# Altium PCB Boost.PcbDoc
Units mil, origin at the board's own origin, x right, y up, seen from the top; angles counter-clockwise.
Board outline 6000 x 4000 mil, 2 copper layers (Top Layer, Bottom Layer); 33 components, 23 nets, 125 pads, 38 vias.
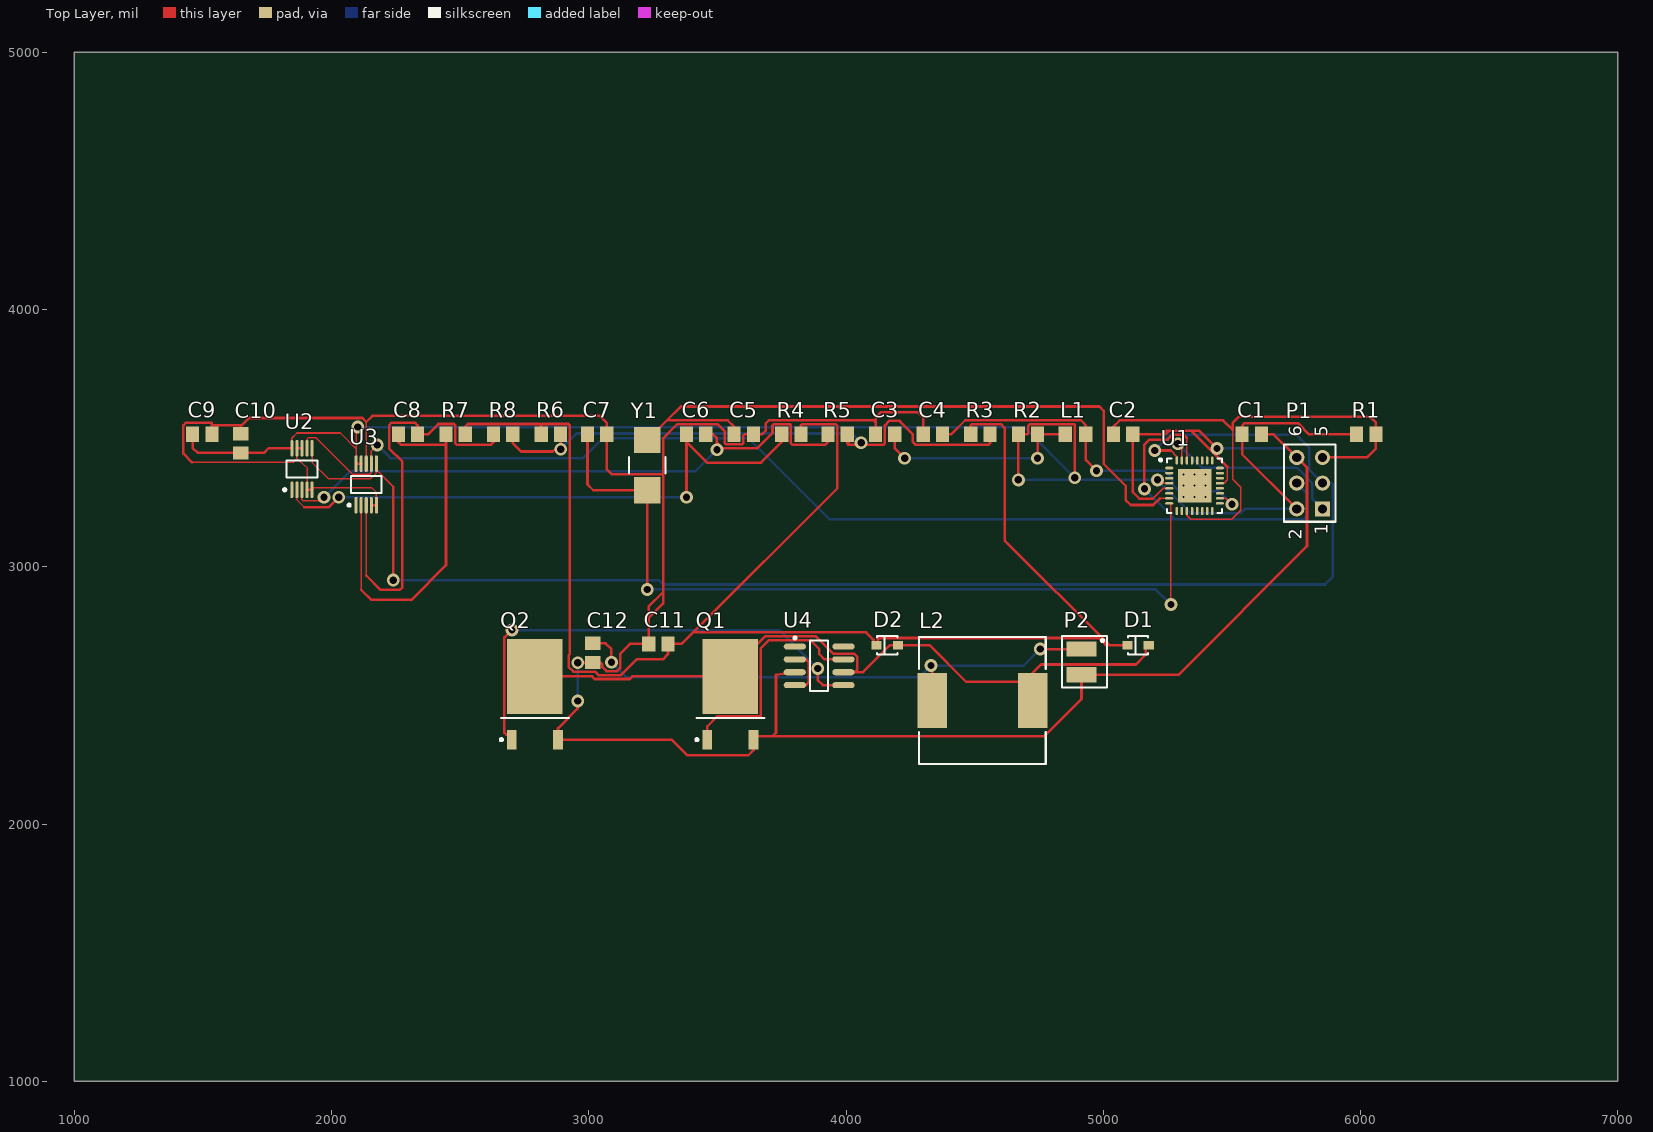
[diagram p0: Top Layer view]
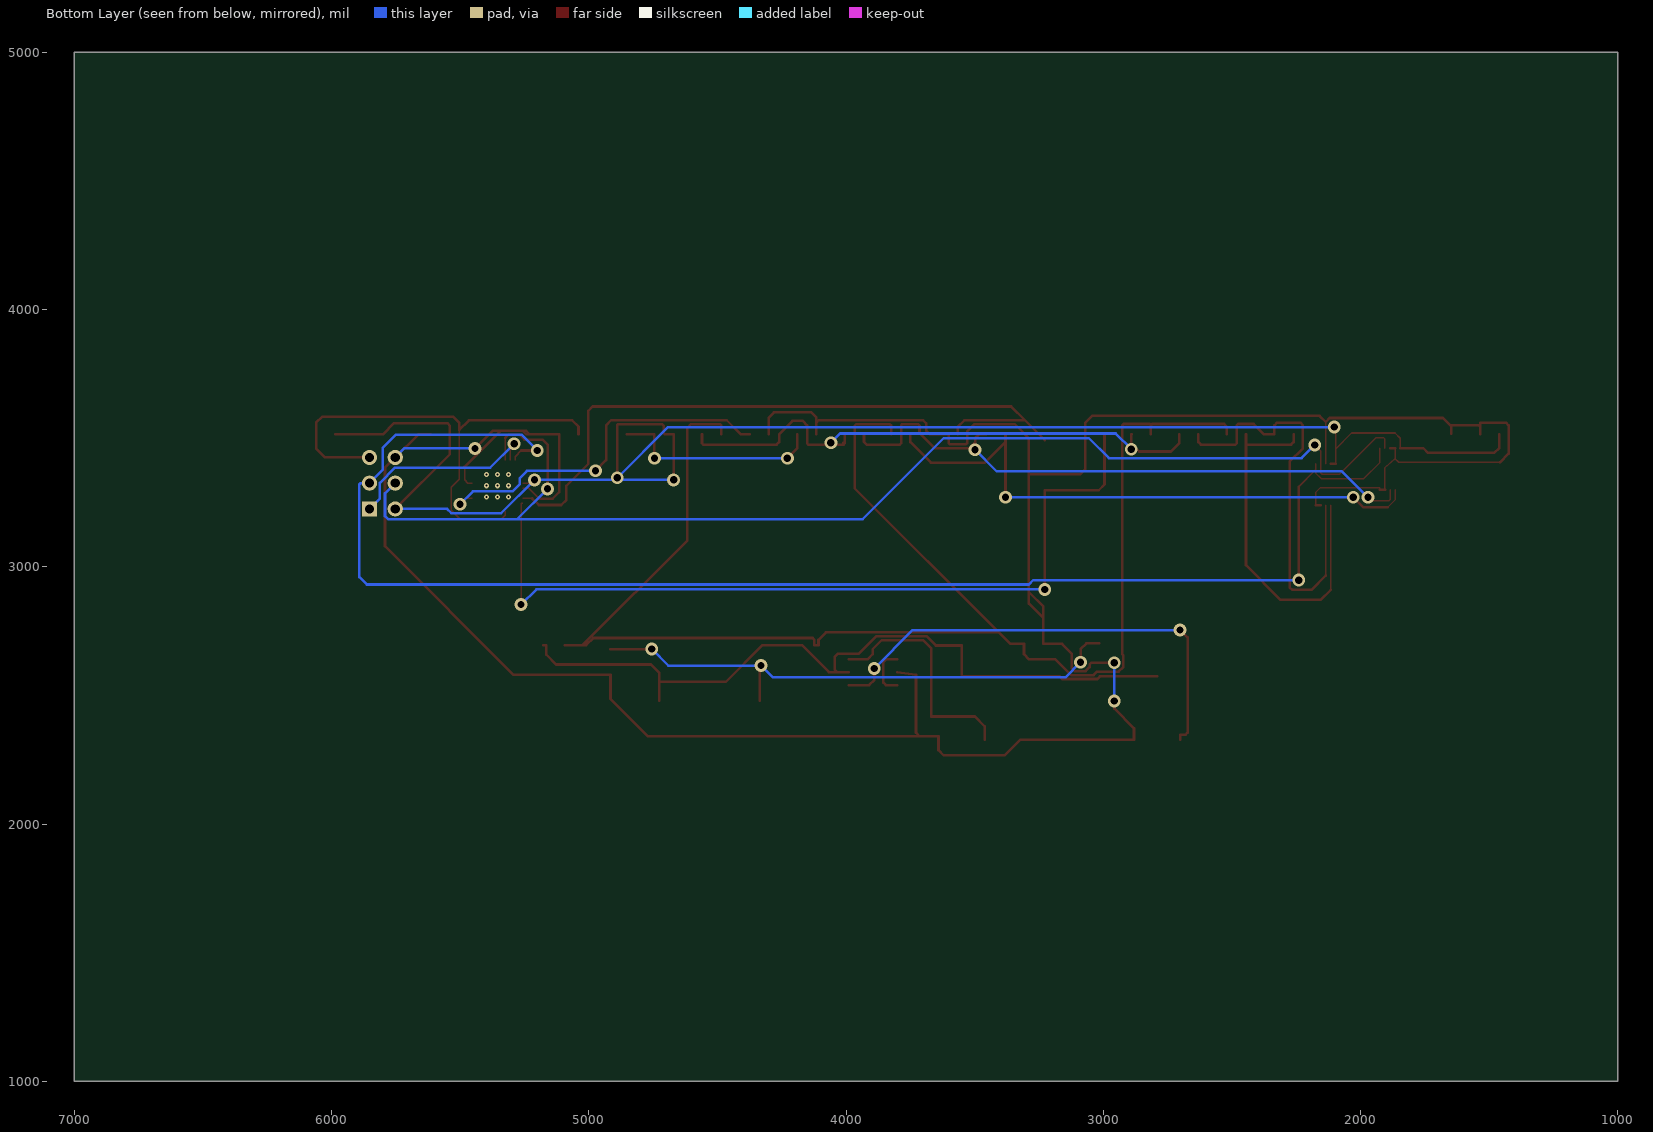
[diagram p1: Bottom Layer view, seen from below]
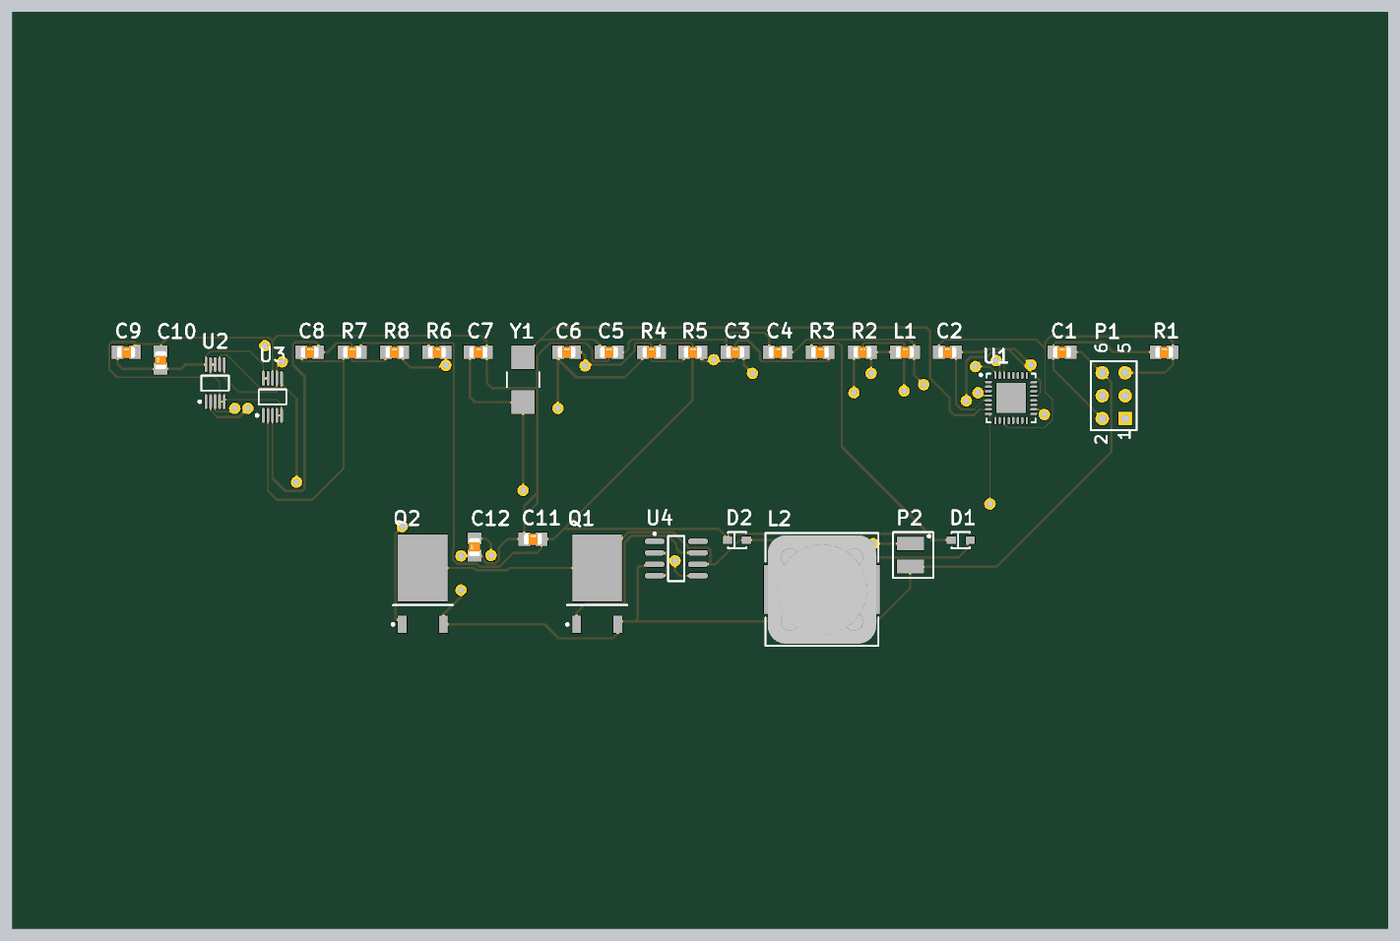
[diagram p2: 3D render of the assembled board from above, using the file's embedded part models]

## Layer stack, top to bottom
Top Solder: solder mask 0.4, Solder Resist, Dk 3.5
Top Layer: signal copper 1.4
Dielectric 1: dielectric 12.6, FR-4, Dk 4.8
Bottom Layer: signal copper 1.4
Bottom Solder: solder mask 0.4, Solder Resist, Dk 3.5

## Board outline
1000,1000 7000,1000 7000,5000 1000,5000

## Design rules (kind name [scope] priority, off if disabled: settings)
Clearance [All] p1: gap=5
PolygonConnect [All] p1: connectstyle=Relief reliefconductorwidth=10 reliefentries=4 polygonreliefangle="90 Angle" airgapwidth=10
RoomDefinition Mppt_Sheet1 [InComponentClass('Mppt_Sheet1')] p1: confinementstyle=ConfineIn formatcopy=TRUE lockcomponents=FALSE outline 1422.4,3090 6097.4,3090 6097.4,3655 1422.4,3655
RoomDefinition Boost [InComponentClass('Boost')] p2: confinementstyle=ConfineIn formatcopy=TRUE lockcomponents=FALSE outline 2635.51,2225 5210.51,2225 5210.51,2840 2635.51,2840
RoutingVias [All] p1: holewidth=28 width=50 viastyle="Through Hole" minholewidth=28 minwidth=50 maxholewidth=28 maxwidth=50
SMDNeckDown [All] p1: percent=50.000
SolderMaskExpansion [All] p1: expansion=4
Width [All] p1: maxlimit=10 minlimit=4 preferedwidth=10
29 further rules are at their usual default settings.

## Classes and differential pairs
component class Mppt_Sheet1: C1 C2 C3 C4 C5 C6 C7 C8 C9 C10 L1 P1 R1 R2 R3 R4 R5 R6 R7 R8 U1 U2 U3 Y1
component class Boost: C11 C12 D1 D2 L2 P2 Q1 Q2 U4

## Components (designator, comment, footprint, x,y, rotation, side; value= is the part's Value field where it differs from the comment)
C1 "Cap_cer_100n_50V" _0805 5577.4,3515 r0 top
C2 "Cap_cer_10n_50V" _0805 5077.4,3515 r0 top
C3 "Cap_cer_100n_50V" _0805 4152.4,3515 r0 top
C4 "Cap_cer_100n_50V" _0805 4337.4,3515 r0 top
C5 "Cap_cer_12p_50V" _0805 3602.4,3515 r0 top
C6 "Cap_cer_10n_50V" _0805 3417.4,3515 r0 top
C7 "Cap_cer_12p_50V" _0805 3032.4,3515 r0 top
C8 "Cap_cer_10n_50V" _0805 2297.4,3515 r0 top
C9 "Cap_cer_100n_50V" _0805 1497.4,3515 r0 top
C10 "Cap_cer_100n_50V" _0805 1647.4,3480 r90 top
C11 "Cap_cer_470n_50V" _0805 3270.51,2700 r0 top
C12 "Cap_cer_470n_50V" _0805 3015.51,2665 r90 top
D1 "1SS355TE" SOD_323 5135.51,2695 r0 top
D2 "1SS355TE" SOD_323 4160.51,2695 r0 top
L1 "IND_47u_0A055" COIL_0805 4892.4,3515 r0 top
L2 "IND_10u_7A1" WE_PD_XXL 4530.51,2480 r0 top
P1 "Header 3X2" HDR2X3 5852.4,3225 r90 top
P2 "2_PAD_SMD" 2_PAD_SMD 4915.51,2630 r0 top
Q1 "IRFR024N" TO-252AA_N 3550.51,2505 r90 top
Q2 "IRFR024N" TO-252AA_N 2790.51,2505 r90 top
R1 "Res_0805" _0805 6022.4,3515 r0 top
R2 "Res_0805" _0805 4707.4,3515 r0 top
R3 "Res_0805" _0805 4522.4,3515 r0 top
R4 "Res_0805" _0805 3787.4,3515 r0 top
R5 "Res_0805" _0805 3967.4,3515 r0 top
R6 "Res_0805" _0805 2852.4,3515 r0 top
R7 "Res_0805" _0805 2482.4,3515 r0 top
R8 "Res_0805" _0805 2667.4,3515 r0 top
U1 "ATtiny26L-8MU" 32M1-A_N 5355,3315 r0 top
U2 "MAX9611AUB+" MAXM-U10+2_N 1885,3380 r90 top
U3 "MAX9611AUB+" MAXM-U10+2_N 2135,3320 r90 top
U4 "MAX4427ESA" NSO8_N 3895.51,2615 r0 top
Y1 "Crystal_16.0MHz" XTAL_SMD 3227.4,3395 r90 top

## Footprints (in the part's own frame and the unit in brackets; to place one, negate y for a bottom-side part, rotate by r counter-clockwise, add the part's x,y. Pads: shape width x height; smd on the part's side, far side on the other; paste and mask are expansions set on the pad)
2_PAD_SMD [mm]
  rect 3x1.5 smd: 1(0,1.27) 2(0,-1.27)
  silkscreen extent -1.9,-2.54 2.54,2.54, body extent -1.91,-2.59 2.6,2.59, height 0.1
32M1-A_N [mm] "QFN, 32-Leads, Body 5x5mm, Pitch 0.5mm, Thermal Pad 3.3x3.3mm, IPC Medium Density"
  oval 0.8x0.25 smd: 1(-2.5,1.75) 2(-2.5,1.25) 3(-2.5,0.75) 4(-2.5,0.25) 5(-2.5,-0.25) 6(-2.5,-0.75) 7(-2.5,-1.25) 8(-2.5,-1.75) 17(2.5,-1.75) 18(2.5,-1.25) 19(2.5,-0.75) 20(2.5,-0.25) 21(2.5,0.25) 22(2.5,0.75) 23(2.5,1.25) 24(2.5,1.75)
  oval 0.25x0.8 smd: 9(-1.75,-2.5) 10(-1.25,-2.5) 11(-0.75,-2.5) 12(-0.25,-2.5) 13(0.25,-2.5) 14(0.75,-2.5) 15(1.25,-2.5) 16(1.75,-2.5) 25(1.75,2.5) 26(1.25,2.5) 27(0.75,2.5) 28(0.25,2.5) 29(-0.25,2.5) 30(-0.75,2.5) 31(-1.25,2.5) 32(-1.75,2.5)
  rect 3.3x3.3 smd: 33(0,0)
  silkscreen extent -3.47,-2.7 2.7,2.7, body extent -2.55,-2.55 2.55,2.55, height 1
_0805 [mm]
  rect 1.3x1.5 smd: 1(-0.95,0) 2(0.95,0)
  body extent -1,-0.64 1,0.62, height 0.78
COIL_0805 [mm]
  rect 1.3x1.5 smd: 1(-1.013,0) 2(1.014,0)
  body extent -1,-0.64 1,0.62, height 0.78
HDR2X3 [mm] "Connector; Header; 3x2 Position"
  rect 1.5x1.5 hole 0.9: 1(0,0)
  round 1.5 hole 0.9: 2(0,2.54) 3(2.54,0) 4(2.54,2.54) 5(5.08,0) 6(5.08,2.54)
  silkscreen extent -1.27,-1.27 6.35,3.81, body extent -0.3,-0.29 5.38,2.84, height 7
MAXM-U10+2_N [mm] "SOP, 10-Leads, Body 3x3mm, Pitch 0.5mm, IPC Medium Density"
  oval 1.65x0.3 smd: 1(-2.05,1) 2(-2.05,0.5) 3(-2.05,0) 4(-2.05,-0.5) 5(-2.05,-1) 6(2.05,-1) 7(2.05,-0.5) 8(2.05,0) 9(2.05,0.5) 10(2.05,1)
  silkscreen extent -2.17,-1.53 0.82,1.82, body extent -1.55,-1.55 1.55,1.55, height 1.1
NSO8_N [mm] "SOIC, 8-Leads, Body 4.9x3.9mm, Pitch 1.27mm, IPC Medium Density"
  oval 2.2x0.6 smd: 1(-2.4,1.905) 2(-2.4,0.635) 3(-2.4,-0.635) 4(-2.4,-1.905) 5(2.4,-1.905) 6(2.4,-0.635) 7(2.4,0.635) 8(2.4,1.905)
  silkscreen extent -2.52,-2.5 0.9,2.88, body extent -2,-2.5 2,2.5, height 1.75
SOD_323 [mm]
  rect 1x0.8 smd: 1(1.05,0) 2(-1.05,0)
  silkscreen extent -1,-0.9 1,0.9, body extent -1.12,-0.85 1.23,0.85, height 1.3
TO-252AA_N [mm] "D-PAK, 4-Leads, Body 6.1x6.5mm, Pitch 2.28mm, Lead Span 9.9mm, IPC Medium Density"
  rect 1.9x0.95 smd: 1(-4.5,2.28) 3(-4.5,-2.28)
  rect 7.4x5.5 smd: 4(1.75,0)
  silkscreen extent -4.62,-3.35 -2.35,3.43, body extent -2.25,-3.37 4.1,3.37, height 2.38
WE_PD_XXL [mm] "SMD Inductor, 2-Leads, Body 12,0x12,0mm"
  rect 2.9x5.4 smd: 1(-4.95,0) 2(4.95,0)
  silkscreen extent -6.25,-6.25 6.25,6.25, body extent -6,-6 6,6, height 10.36
XTAL_SMD [mm]
  rect 2.6x2.6 smd: 1(-2.476,0) 2(2.476,0)
  silkscreen extent -0.8,-1.8 0.8,1.8, body extent -2.4,-1.8 2.4,1.8, height 1.4

## Part data
C1 C3 C4 C9 C10: library part Cap_124
C2 C6 C8: library part Cap_120
C5 C7: library part Cap_109
C11 C12: library part Cap_127
D1 D2: library part DIODE_14
L1: library part Ind_41, "Inductor"
L2: library part Ind_3, "Inductor"
P1: library part Con_41
P2: library part Con_56
Q1 Q2: "HEXFET N-Channel Power MOSFET"
R1 R2 R3 R4 R5 R6 R7 R8: library part Res_6
U1: "8-bit AVR Microcontroller, 2.7-5.5V, 8MHz, 2KB Flash, 128 Bytes EEPROM, 128 Bytes SRAM, 32-pin MLF, Industrial Grade (-40°C to 85°C), Pb-Free"
U2 U3: "High-side Current-Sense Amplifier with 12-bit I2C ADC and Op Amp / Comparator - Non-inverting, Adjustable Gain, -40 to 125 degC, 10-Pin SOP (U10+2), Pb-Free"
U4: "Dual High-Speed 1.5A MOSFET Driver"
Y1: library part Crystal_19

## Via types
v1: diameter 50, hole 28, Top Layer to Bottom Layer, 29 vias
v2: diameter 19.68, hole 7.87, Top Layer to Bottom Layer, 9 vias

## Nets (pads, with @x,y where several pads share a name; then routed paths per layer and width w, separated by ;. In a path a pad name is that pad's centre, name@x,y a point inside that pad or via, vN(x,y) a via of type N, cw(c..) or ccw(c..) an arc to the next point about the centre after c; other vN are vias at no path point)
+5V: C1.1 C9.1 C10.1 P1.2 R1.1 R2.1 U1.4 U2.10 U3.9 U3.10 | length 6517.8
  Top Layer w4.92: v1@5224.16,3324.84 U1.4
  Top Layer w5.91: U2.10 1845.63,3500 1865.63,3520 2034.63,3520 2095.63,3459 ; U3.10 2095.63,3459 ; v1@2095.63,3536.63 2095.63,3459
  Top Layer w10: C9.1 1460,3462.6 1480,3442.6 C10.1 1737,3442.6 1755.11,3460.71 U2.10 ; U3.10 U3.9 ; v1@2095.63,3536.63 v1(2102,3543) ; v1(4670,3338) R2.1 4704.21,3515 4709.21,3520 4709.21,3548.74 4715,3554.53 4885.47,3554.53 4889,3551 v1(4889,3346) ; v1(5211,3338) v1@5224.16,3324.84 ; P1.2 5540,3437.4 C1.1 5540,3548 5550,3558 5757,3558 5800,3515 R1.1
  Bottom Layer w10: v1(2102,3543) 4692,3543 v1(4889,3346) ; v1(4670,3338) v1(5211,3338) 5341,3208 5534.17,3208 5551.17,3225 P1.2
GND: C1.2 C2.2 C3.1 C4.1 C5.2 C7.2 C9.2 C10.2 C11.1 C12.1 P1.6 P2.2 Q1.3 Q2.3 U1.5 U1.21 U2.4 U2.5 U2.8 U2.9 U3.4 U3.5 U3.8 U4.3 | length 12038.3
  Top Layer w4.92: 5192.84,3265 5233,3305.16 U1.5 ; U1.21 5470,3324.84 5483,3337.84 5483,3388.37
  Top Layer w5.91: 1458,3406 1851.31,3406 1865.31,3420 ; U2.9 1865.31,3420 ; U2.4 1904.69,3385.63 1865.31,3420 ; U2.5 1924.37,3308 2155,3308 2174.37,3288.63 U3.5 ; U3.8 2135,3563 2135,3563.31
  Top Layer w10: 1458,3406 1424,3440 1424,3550 1434,3560 1534,3560 1534.8,3559.2 1534.8,3545.2 ; C9.2 1534.8,3545.2 ; C10.2 1647.4,3546.4 ; U2.9 U2.8 ; U2.4 U2.5 ; 2135,3563 2159,3587 3042.8,3587 3069.8,3560 C7.2 3069.8,3380 3090.8,3359 3289,3359 ; 2135,3563.31 2120,3578.31 1679.31,3578.31 1647.4,3546.4 ; U3.4 U3.5 ; Q2.3 Q2.3@2880.28,2328 ; v1(2957,2478) 2957,2448.72 2880.28,2372 Q2.3@2880.28,2328 ; v1(2957,2627) 2957.6,2627.6 C12.1 3045.21,2627.6 3052.81,2620 3052.81,2610 3068.81,2594 3110,2594 3123,2607 3123,2662.6 3160.4,2700 C11.1 3233.11,2801.11 ; U4.3 3728,2580 3728,2355 3714,2341 ; C3.1 4115,3561 ; C4.1 4300,3580 4280,3600 4135,3600 4115,3580 4115,3561 ; 5192.84,3265 5140,3265 5114.8,3290.2 C2.2 5229.65,3515 ; v1(5442,3460) 5373.64,3528.36 5343.01,3528.36 ; 5483,3388.37 5343.01,3528.36 ; C1.2 5662.4,3515 P1.6 5792,3385.4 5792,3080 5292,2580 P2.2 4915.51,2486.51 4770,2341 3714,2341 ; 1534.8,3545.2 1540,3550.4 1643.41,3550.4 1647.4,3546.4 ; Q2.3@2880.28,2328 3322,2328 3383,2267 3620,2267 3640.28,2287.28 Q1.3 3640.28,2341 3714,2341 ; 3233.11,2801.11 3233.11,2845 3289,2900.89 ; 3233.11,2801.11 3289,2857 3289,2900.89 ; 3289,2900.89 3289,3359 ; 3289,3359 3289,3499.53 3344,3554.53 3500,3554.53 3529.41,3525.12 3529.41,3481.06 3535,3475.47 3595,3475.47 3600.59,3481.06 3600.59,3510 3605.59,3515 C5.2 3674,3515 3688.07,3529.07 3688.07,3557.6 3700,3569.53 4106.47,3569.53 4115,3561 ; 5229.65,3515 5243.01,3515 5256.37,3528.36 ; 5229.65,3515 5243.01,3528.36 5256.37,3528.36 ; 5256.37,3528.36 5343.01,3528.36
  Bottom Layer w10: v1(2957,2478) v1(2957,2627) ; v1(5442,3460) 5717.4,3460 P1.6
NetC2_1: C2.1 P1.5 R1.2 U1.11 | length 2017.6
  Top Layer w4.92: U1.11 5325.47,3199.53 5340,3185 5500,3185 5535,3220 5535,3309 5504,3340 5504,3530.97
  Top Layer w10: C2.1 5040,3545 5064.53,3569.53 5465.47,3569.5 5504,3530.97 5504,3560 5528,3584 6035.8,3584 6059.8,3560 R1.2 6059.8,3460 6024.8,3425 P1.5
NetC3_2: C3.2 L1.1 R2.2 | length 826.3
  Top Layer w10: C3.2 4189.8,3460.2 v1(4228,3422) ; v1(4744.8,3422) R2.2 L1.1
  Bottom Layer w10: v1(4228,3422) v1(4744.8,3422)
NetC4_2: C4.2 L1.2 U1.18 | length 1432.4
  Top Layer w4.92: U1.18 5477.21,3265.79 v1(5500,3243)
  Top Layer w10: C4.2 4409,3515 4463.53,3569.53 4912.77,3569.53 4932.3,3550 L1.2 4932.3,3414.7 v1(4974,3373)
  Bottom Layer w10: v1(4974,3373) 5240,3373 5269,3344 5269,3320 5296,3293 5450,3293 v1(5500,3243)
NetC5_1: C5.1 U1.7 Y1.2 | length 2705.9
  Top Layer w4.92: 5220,3265.79 U1.7
  Top Layer w10: Y1.2 3304.45,3569.53 ; C5.1 3565,3544.53 3540,3569.53 3304.45,3569.53 ; 5220,3265.79 5194.21,3240 5107,3240 5087,3260 5087,3315 5002,3400 5002,3606 4985,3623 3357.92,3623 3304.45,3569.53
NetC6_1: C6.1 R4.1 U2.2 | length 2292.6
  Top Layer w5.91: U2.2 1865.31,3260 1893.31,3232
  Top Layer w10: 1893.31,3232 1990,3232 v1(2028,3270) ; v1(3380,3270) 3380,3485 ; C6.1 3380,3485 ; R4.1 3750,3485 3670,3405 3460,3405 3380,3485
  Bottom Layer w10: v1(2028,3270) v1(3380,3270)
NetC6_2: C6.2 R5.1 U2.3 | length 2435.3
  Top Layer w5.91: U2.3 1885,3261 1890,3256 v1@1957,3256
  Top Layer w10: v1@1957,3256 v1(1971,3270) ; C6.2 3483,3515 3498,3500 3498,3482.47 ; v1(3498,3455) 3498,3482.47 ; R5.1 3930,3485 3920,3475 3791,3475 3786,3480 3786,3550 3781.47,3554.53 3720,3554.53 3714.41,3548.94 3714.41,3520 3654.88,3460.47 3520,3460.47 3498,3482.47
  Bottom Layer w10: v1(1971,3270) 2072,3371 3414,3371 v1(3498,3455)
NetC7_1: C7.1 U1.8 Y1.1 | length 3281.8
  Top Layer w4.92: U1.8 5263,3246.1 v1(5263,2853)
  Top Layer w10: C7.1 2995,3320 3017.48,3297.52 Y1.1 v1(3227.4,2912)
  Bottom Layer w10: v1(3227.4,2912) 5204,2912 v1(5263,2853)
NetC8_1: C8.1 R7.1 U3.2 | length 1460.9
  Top Layer w5.91: 2115.31,2910.69 U3.2
  Top Layer w10: 2115.31,2910.69 2155,2871 2310,2871 2445,3006 2445,3480 ; C8.1 2260,3485 2270,3475 2440,3475 2445,3480 ; R7.1 2445,3480
NetC8_2: C8.2 R8.1 U3.3 | length 1665.9
  Top Layer w5.91: 2135,2966 U3.3
  Top Layer w10: 2135,2966 2191,2910 2265,2910 2275,2920 2275,3409 2224,3460 2224,3550 2234,3560 2324.8,3560 2334.8,3550 C8.2 2375,3515 2415,3555 2476,3555 2481,3550 2481,3480 2486,3475 2620,3475 2630,3485 R8.1
NetC11_2: C11.2 D1.2 D2.2 R3.1 R4.2 R6.1 R7.2 | length 6172.9
  Top Layer w10: R7.2 2519.8,3544.8 2530,3555 2810,3555 2815,3550 ; R6.1 2815,3550 ; R4.2 3824.8,3549.33 3830,3554.53 3960,3554.53 3966,3548.53 3966,3305 3406,2745 ; R3.1 4485,3549.53 4490,3554.53 4602.47,3554.53 4617,3540 4617,3102 5024,2695 ; D1.2 5024,2695 ; 2815,3550 2820,3555 2921,3555 2926,3550 2926,2659.23 2922,2655.23 2922,2610 2940,2592 3024.51,2592 3037.81,2578.7 3124.51,2578.7 3185.81,2640 3287.91,2640 3307.91,2660 C11.2 3361,2700 3406,2745 ; 3406,2745 4078,2745 4107,2716 4107,2695 D2.2 4123,2695 4123,2716 4130,2723 4982,2723 5010,2695 5024,2695
NetC12_2: C12.2 L2.1 P2.1 | length 2168.6
  Top Layer w10: C12.2 3065.6,2702.4 3088,2680 v1(3088,2629) ; v1(4330,2616) 4335.63,2610.37 L2.1 ; v1(4755,2680) P2.1
  Bottom Layer w10: v1(3088,2629) 3147,2570 4284,2570 v1(4330,2616) 4691,2616 v1(4755,2680)
NetD1_1: D1.1 D2.1 L2.2 Q1.4 Q2.4 U4.6 | length 2957.1
  Top Layer w10: Q2.4 3012.61,2573.9 3022.81,2563.7 3159.8,2563.7 3170,2573.9 Q1.4 3550.51,2694 3651,2694 3687,2730 3882,2730 3950,2662 4032,2662 4044,2650 4044,2600 4034,2590 ; U4.6 4034,2590 ; L2.2 L2.2@4725.39,2553 ; D1.1 5165,2695 5165,2658 5127,2620 4757.92,2620 4725.39,2587.47 L2.2@4725.39,2553 ; 4034,2590 4066,2590 4171,2695 D2.1 4325,2695 4467,2553 L2.2@4725.39,2553
NetP1_1: P1.1 U1.31 | length 773.8
  Top Layer w4.92: U1.31 v1@5305.79,3462.21
  Top Layer w10: v1(5290,3478) v1@5305.79,3462.21
  Bottom Layer w10: v1(5290,3478) 5383,3385 5753,3385 5812,3326 5812,3265.4 P1.1
NetP1_3: P1.3 U1.32 U2.6 U3.6 | length 5822.6
  Top Layer w4.92: 5262.53,3452 5286.1,3428.43 U1.32
  Top Layer w5.91: U2.6 1924.37,3405.63 1988.13,3341.87 2151.24,3341.87 2174.37,3365 U3.6@2174.37,3377 ; U3.6 U3.6@2174.37,3377 ; 2240,3311.37 U3.6@2174.37,3377
  Top Layer w10: v1(2240,2947.92) 2240,3311.37 ; v1(5200,3452) 5262.53,3452
  Bottom Layer w10: v1(2240,2947.92) 3272.12,2947.92 3289.04,2931 5863,2931 5892,2960 5892,3320 5887,3325 P1.3 5801,3376.4 5801,3462 5749.64,3513.36 5261.36,3513.36 v1(5200,3452)
NetP1_4: P1.4 U1.30 U2.7 U3.7 | length 5025.9
  Top Layer w4.92: U1.30 5325.47,3500
  Top Layer w5.91: U2.7 1904.69,3496.69 1910,3502 1939,3502 2081,3360 2149,3360 2154.69,3365.69 U3.7 2154.69,3449.69 v1(2178,3473)
  Top Layer w10: v1(5160,3303) 5160,3475 5179,3494 5250.64,3494 5270,3513.36 5312.11,3513.36 5325.47,3500
  Bottom Layer w10: v1(2178,3473) 2229,3422 2978.4,3422 3056.28,3499.89 3620.01,3499.89 3934.9,3185 5278,3185 ; v1(5160,3303) 5278,3185 ; P1.4 5792,3285.4 5792,3197 5780,3185 5278,3185
NetQ1_1: Q1.1 U4.7 | length 918.8
  Top Layer w10: Q1.1 3460.75,2380 3498.75,2418 3669,2418 3669,2684 3700,2715 3861,2715 3896,2680 3896,2660 3916,2640 U4.7
NetQ2_1: Q2.1 U4.5 | length 1866.2
  Top Layer w10: Q2.1 2700.75,2347 2680,2347 2672,2355 2672,2725 v1(2701,2754) ; v1(3890,2605) 3890,2560 3910,2540 U4.5
  Bottom Layer w10: v1(2701,2754) 3741,2754 v1(3890,2605)
NetR3_2: R3.2 R5.2 R6.2 R8.2 | length 2297.1
  Top Layer w10: R8.2 2704.8,3480 2736.8,3448 2860,3448 2889.8,3477.8 v1@2891,3477.8 ; R6.2 2891,3515 v1@2891,3477.8 ; v1(2891,3457) v1@2891,3477.8 ; R5.2 4004.8,3482 ; v1(4059,3482) v1@4059,3475 ; R3.2 4559.8,3480 4554.8,3475 4270,3475 4260,3485 4260,3515 4208,3567 4168,3567 4151,3550 4151,3480 4146,3475 v1@4059,3475 ; 4004.8,3482 4004.8,3480 4009.8,3475 ; 4004.8,3482 4009.8,3482 4009.8,3475 ; 4009.8,3475 v1@4059,3475
  Bottom Layer w10: v1(2891,3457) 2952,3518 4023,3518 v1(4059,3482)
NetU1_25: U1.25
NetU1_26: U1.26
NetU4_2: U4.2 U4.4 | length 196.2
  Top Layer w10: U4.4 3845,2540 3855,2550 3855,2630 3845,2640 U4.2
pads on no net: U1.1 U1.2 U1.3 U1.6 U1.9 U1.10 U1.12 U1.13 U1.14 U1.15 U1.16 U1.17 U1.19 U1.20 U1.22 U1.23 U1.24 U1.27 U1.28 U1.29 U1.33 U2.1 U3.1 U4.1 U4.8
copper on no net:
  other v2: 5311.69,3271.69 5355,3271.69 5398.31,3271.69 5311.69,3315 5355,3315 5398.31,3315 5311.69,3358.31 5355,3358.31 5398.31,3358.31

## Text inside footprints (layer, text, board x,y; h text height)
P1: Top Overlay "6" at 5772.4,3504.68 h50 r90; Top Overlay "5" at 5872.4,3504.68 h50 r90; Top Overlay "2" at 5772.4,3105.32 h50 r90; Top Overlay "1" at 5872.4,3125.32 h50 r90